# Altium PCB PCB1.PcbDoc
Units mm, origin at the board's own origin, x right, y up, seen from the top; angles counter-clockwise.
Board outline 152.4 x 101.6 mm, 2 copper layers (Top Layer, Bottom Layer), stack 1.071 mm thick; 47 components, 50 nets, 187 pads, 20 vias.
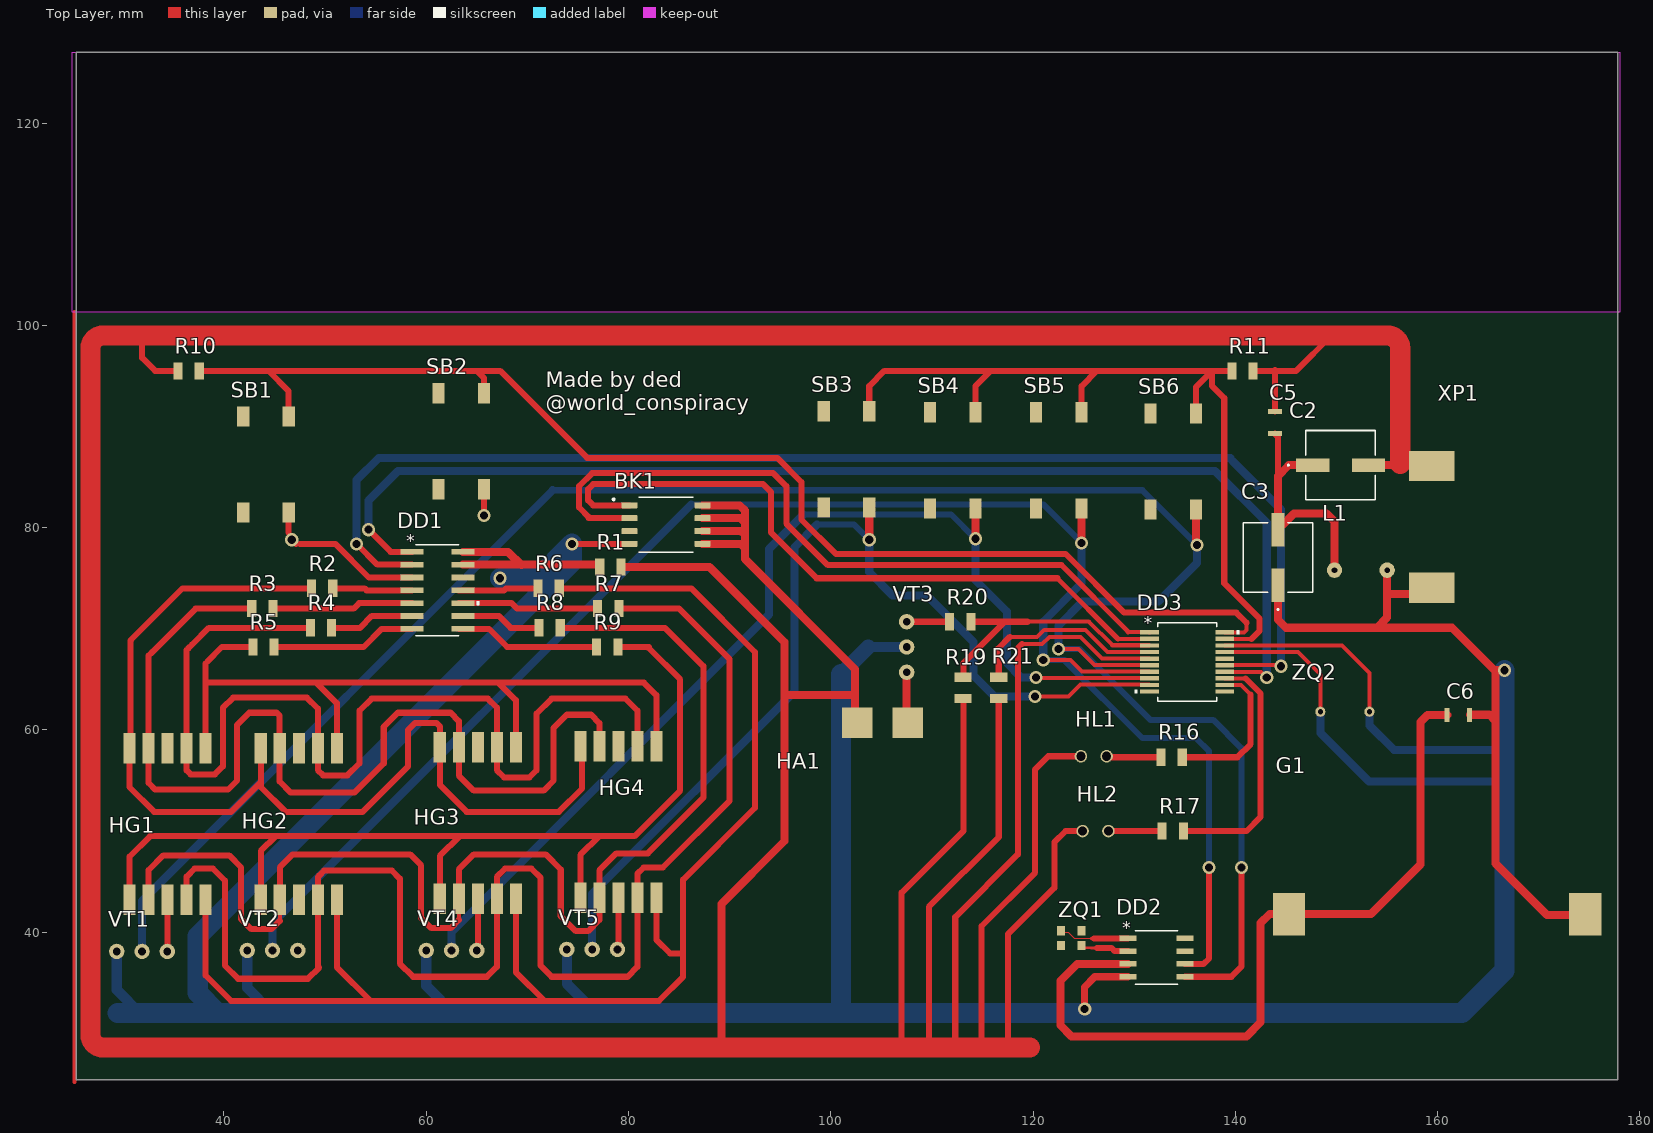
[diagram p0: Top Layer view]
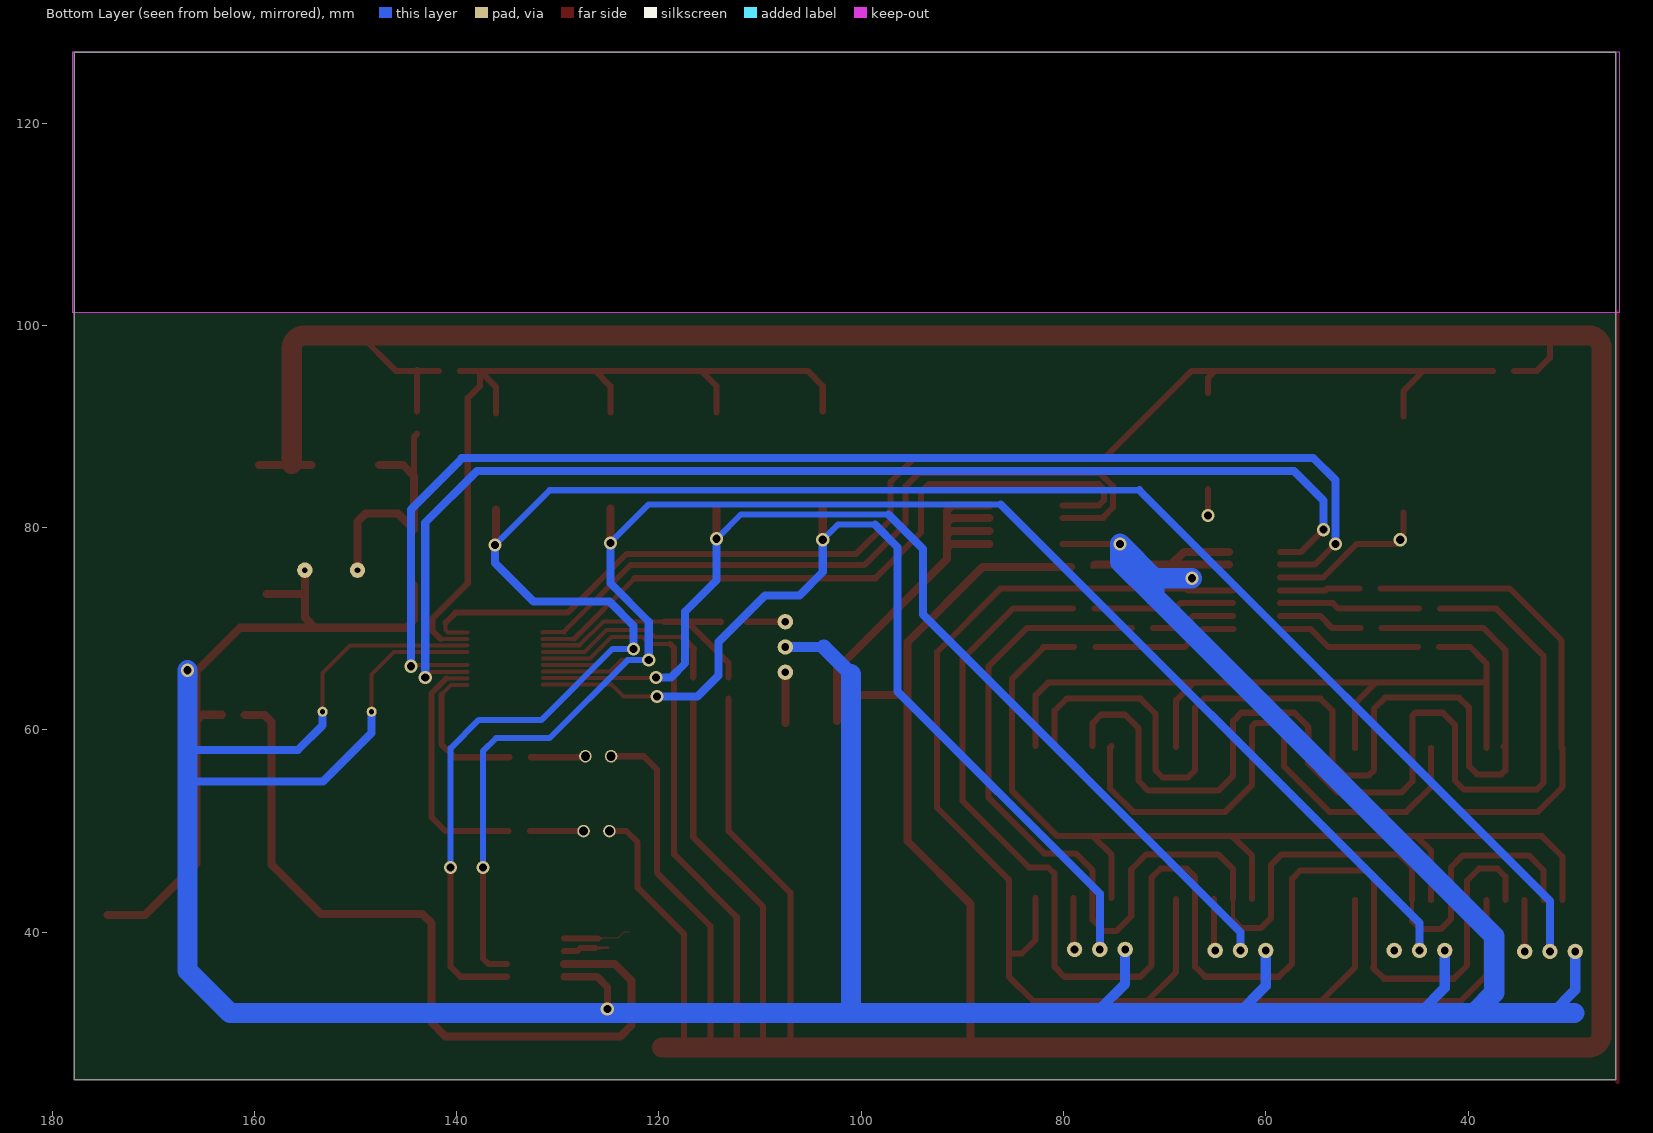
[diagram p1: Bottom Layer view, seen from below]

## Layer stack, top to bottom
Top Solder: solder mask 0.0102, Solder Resist, Dk 3.5
Top Layer: signal copper 0.0356
Dielectric 1: dielectric 1, FR-4, Dk 4.8
Bottom Layer: signal copper 0.0356
Bottom Solder: solder mask 0.0102, Solder Resist, Dk 3.5

## Board outline
25.4,25.4 177.8,25.4 177.8,127 25.4,127
cut-out: 178,127 178,101.3 25,101.3 25,127

## Design rules (kind name [scope] priority, off if disabled: settings)
Clearance [All] p1: gap=0.15 ignorepadtopadclearanceinfootprint=TRUE
ComponentClearance [All] p1: gap=0.254 collisioncheckmode=3 verticalgap=0 showdistances=FALSE
PolygonConnect [All] p1: connectstyle=Relief reliefconductorwidth=0.254 reliefentries=4 polygonreliefangle="90 Angle" airgapwidth=0.254
RoutingVias [All] p1: holewidth=0.711 width=1.27 viastyle="Through Hole" minholewidth=0.711 minwidth=1.27 maxholewidth=0.711 maxwidth=1.27
SolderMaskExpansion [All] p1: expansion=0.102 istentingtop=FALSE
Width [All] p1: maxlimit=2.5 minlimit=0.1 preferedwidth=0.4
29 further rules are at their usual default settings.

## Classes and differential pairs
component class Sheet1: HG1 HG2 HG3 HG4

## Components (designator, comment, footprint, x,y, rotation, side; value= is the part's Value field where it differs from the comment)
BK1 "Comment" DS1621 83.7,80.3 r0 top
C2 "Comment" ELECTROLYTHIC 150.4,86.175 r0 top
C3 "Comment" ELECTROLYTHIC 144.207,77.055 r90 top
C5 "Comment" 0805_C 143.9,89.3 r90 top
C6 "Comment" 0805_C 160.943,61.485 r0 top
DD1 "Comment" CD74HC164 61.1,73.8 r0 top
DD2 "Comment" DS1307 132.2,37.5 r0 top
DD3 "Comment" PIC16F84A 135.223,66.725 r0 top
G1 "Comment" CR2032 145.3,41.8 r0 top
HA1 "Comment" 1205FXP 107.6,60.7 r180 top
HG1 "FYS-10012BUG Foryard optoelectronics" "SMA802W G/W" 30.66,58.2 r0 top
HG2 "FYS-10012BUG Foryard optoelectronics" "SMA802W G/W" 43.64,58.2 r0 top
HG3 "FYS-10012BUG Foryard optoelectronics" "SMA802W G/W" 61.34,58.3 r0 top
HG4 "FYS-10012BUG Foryard optoelectronics" "SMA802W G/W" 75.24,58.4 r0 top
HL1 "Comment" L-34GD 124.724,57.4 r0 top
HL2 "Comment" L-34GD 124.9,50 r0 top
L1 "Comment" WVL9FJ560K 149.8,75.8 r0 top
R1 "Comment" 0805_R 78.2,76.1 r0 top
R2 "Comment" 0805_R 49.7,74 r0 top
R3 "Comment" 0805_R 43.8,72 r0 top
R4 "Comment" 0805_R 49.6,70.1 r0 top
R5 "Comment" 0805_R 43.9,68.2 r0 top
R6 "Comment" 0805_R 72.1,74 r180 top
R7 "Comment" 0805_R 78,72 r180 top
R8 "Comment" 0805_R 72.2,70.1 r180 top
R9 "Comment" 0805_R 77.9,68.2 r180 top
R10 "Comment" 0805_R 36.5,95.5 r0 top
R11 "Comment" 0805_R 140.7,95.5 r0 top
R16 "Comment" 0805_R 133.7,57.3 r0 top
R17 "Comment" 0805_R 133.8,50 r0 top
R19 "Comment" 0805_R 113.062,64.157 r90 top
R20 "Comment" 0805_R 112.8,70.7 r0 top
R21 "Comment" 0805_R 116.6,64.157 r90 top
SB1 "Comment" TS-A3PG-130 41.9,81.5 r90 top
SB2 "Comment" TS-A3PG-130 61.2,83.8 r90 top
SB3 "Comment" TS-A3PG-130 99.3,82 r90 top
SB4 "Comment" TS-A3PG-130 109.8,81.9 r90 top
SB5 "Comment" TS-A3PG-130 120.3,81.9 r90 top
SB6 "Comment" TS-A3PG-130 131.6,81.8 r90 top
VT1 "Comment" KT361B 29.4,38.1 r0 top
VT2 "Comment" KT361B 42.3,38.2 r0 top
VT3 "Comment" KT315B 107.5,65.7 r90 top
VT4 "Comment" KT361B 60,38.2 r0 top
VT5 "Comment" KT361B 73.9,38.3 r0 top
XP1 "Comment" KLS1-AS-222-11 159.4,86.1 r270 top
ZQ1 "Comment" DT-38 124.8,38.7 r180 top
ZQ2 "Comment" HC-49S 148.4,61.8 r0 top

## Footprints (in the part's own frame and the unit in brackets; to place one, negate y for a bottom-side part, rotate by r counter-clockwise, add the part's x,y. Pads: shape width x height; smd on the part's side, far side on the other; paste and mask are expansions set on the pad)
0805_C [mm]
  rect 0.5x1.4 smd: 1(0,0) 2(2.2,0)
  body extent 0,-0.6 2.2,0.6, height 0.4
0805_R [mm]
  rect 0.9x1.7 smd: 1(-1.05,0) 2(1.05,0)
  body extent -1.05,-0.7 1.05,0.7, height 0.4
1205FXP [mm]
  rect 3x3 smd: 1(0,0) 2(5,0)
  body extent -12.45,4.87 17.98,35.2, height 20
CD74HC164 [mm]
  rect 2.27x0.558 smd paste+0 mask+0: 1(-2.514,3.81) 2(-2.514,2.54) 3(-2.514,1.27) 4(-2.514,0) 5(-2.514,-1.27) 6(-2.514,-2.54) 7(-2.514,-3.81) 8(2.514,-3.81) 9(2.514,-2.54) 10(2.514,-1.27) 11(2.514,0) 12(2.514,1.27) 13(2.514,2.54) 14(2.514,3.81)
  silkscreen extent -2.12,-4.5 4.16,4.5, body extent -3.01,-4.32 3.01,4.33, height 1.75
CR2032 [mm]
  rect 3.2x4.2 smd: 1(0,0) 2(29.3,0)
  body extent -1,-15.6 30.2,15.6, height 5
DS1307 [mm]
  rect 1.655x0.533 smd paste+0 mask+0: 1(-2.821,1.905) 2(-2.821,0.635) 3(-2.821,-0.635) 4(-2.821,-1.905) 5(2.821,-1.905) 6(2.821,-0.635) 7(2.821,0.635) 8(2.821,1.905)
  silkscreen extent -2.12,-2.63 2.12,2.63, body extent -3.1,-2.5 3.1,2.5, height 1.76
DS1621 [mm]
  rrect25% 1.57x0.6 smd: 1(-3.605,1.905) 2(-3.605,0.635) 3(-3.605,-0.635) 4(-3.605,-1.905) 5(3.605,-1.905) 6(3.605,-0.635) 7(3.605,0.635) 8(3.605,1.905)
  silkscreen extent -5.27,-2.73 2.71,2.73, body extent -3.1,-2.5 3.1,2.5, height 1.76
DT-38 [mm]
  rect 0.8x0.9 smd: 1(0,-1.45) 2(2.05,-1.45) 3(2.05,0) 4(0,0)
  Top Layer lines w0.1: 1.9,-1.3 1.35,-1.3 0.75,-0.7 -0.925,-0.7
  Top Layer lines w0.254: -0.225,0.25 -0.925,0.25
  Top Layer lines w0.3: -0.925,0.25 -1.525,0.25 ; -0.925,-0.7 -1.525,-0.7
  body extent -0.2,-1.7 2.3,0.3, height 0.8
ELECTROLYTHIC [mm]
  rect 3.291x1.313 smd paste+0 mask+0: 1(-2.75,0) 2(2.75,0)
  silkscreen extent -5.23,-3.43 3.43,3.43, body extent -3.7,-3.3 3.7,3.3, height 8.05
HC-49S [mm]
  round 1 hole 0.5: 1(0,0) 2(4.85,0)
  body extent -3.05,-2.3 7.95,2.35, height 13.46
KLS1-AS-222-11 [mm]
  rect 3x4.5 smd: 1(0,0) 2(12.05,0)
  body extent -9.97,2.32 22.1,21.78, height 7
KT315B [mil]
  round 60 hole 30: 1(0,0) 2(98.43,0) 3(196.85,0)
  body extent -42,-56 242,63, height 197
KT361B [mil]
  round 60 hole 30: 1(0,0) 2(98.43,0) 3(196.85,0)
  body extent -42,-56 242,63, height 197
L-34GD [mm]
  round 1.24 hole 0.9: 1(0,0) 2(2.55,0)
  body extent -0.7,-1.95 3.35,2.05, height 5.3
PIC16F84A [mm]
  rect 1.858x0.431 smd paste+0 mask+0: 1(-3.723,2.925) 2(-3.723,2.275) 3(-3.723,1.625) 4(-3.723,0.975) 5(-3.723,0.325) 6(-3.723,-0.325) 7(-3.723,-0.975) 8(-3.723,-1.625) 9(-3.723,-2.275) 10(-3.723,-2.925) 11(3.723,-2.925) 12(3.723,-2.275) 13(3.723,-1.625) 14(3.723,-0.975) 15(3.723,-0.325) 16(3.723,0.325) 17(3.723,0.975) 18(3.723,1.625) 19(3.723,2.275) 20(3.723,2.925)
  silkscreen extent -5.16,-3.87 5.16,3.87, body extent -4.18,-3.75 4.03,3.75, height 2.01
"SMA802W G/W" [mm]
  rect 1.2x3 smd: 1(0,0) 2(1.88,0) 3(3.76,0) 4(5.64,0) 5(7.52,0) 6(0,-15) 7(1.88,-15) 8(3.76,-15) 9(5.64,-15) 10(7.52,-15)
  body extent -0.75,-14.8 8.35,0.2, height 3.75
TS-A3PG-130 [mm]
  rect 2x1.2 smd: 1(0,0) 2(9.5,0) 3(0,-4.5) 4(9.5,-4.5)
  body extent -0.3,-5.4 9.7,0.9, height 7.65
WVL9FJ560K [mil]
  round 60 hole 21.65: 1(0,0) 2(204.72,0)
  body extent -52,-157 263,157, height 394

## Part data
HG1 HG2 HG3 HG4: library part "SMA802W G/W", "https://www.digikey.com/en/products/detail/american-opto-plus/SMA802W-G-W/13686837", Manufacturer="Foryard optoelectronics", Name=FYS-10012BUG

## Via types
v1: diameter 1.3, hole 0.8, Top Layer to Bottom Layer, 20 vias

## Nets (pads, with @x,y where several pads share a name; then routed paths per layer and width w, separated by ;. In a path a pad name is that pad's centre, name@x,y a point inside that pad or via, vN(x,y) a via of type N, cw(c..) or ccw(c..) an arc to the next point about the centre after c; other vN are vias at no path point)
1: 
2: 
3: 
4: 
5: 
6: 
7: 
8: 
11: 
12: 
13: 
14: 
15: 
16: 
17: 
18: 
NetBK1_1: 
NetBK1_2: 
NetBK1_4: 
NetBK1_5: 
NetC1_2: 
NetC6_2: 
NetC7_2: 
NetC8_2: 
NetDD1_3: 
NetDD1_4: 
NetDD1_5: 
NetDD1_6: 
NetDD1_10: 
NetDD1_11: 
NetDD1_12: 
NetDD1_13: 
NetDD2_1: 
NetDD2_2: 
NetDD3_3: 
NetDD3_4: 
NetDD3_17: 
NetDD3_18: 
NetHA1_2: 
NetHG1_8: 
NetHG2_8: HG2.8
NetHG3_8: 
NetHG4_8: 
NetHL1_2: 
NetHL2_2: 
NetR14_2: 
NetR15_2: 
NetR18_2: 
NetR20_1: 
NetR22_2: 
pads on no net: BK1.1 BK1.2 BK1.3 BK1.4 BK1.5 BK1.6 BK1.7 BK1.8 C2.1 C2.2 C3.1 C3.2 C5.1 C5.2 C6.1 C6.2 DD1.1 DD1.2 DD1.3 DD1.4 DD1.5 DD1.6 DD1.7 DD1.8 DD1.9 DD1.10 DD1.11 DD1.12 DD1.13 DD1.14 DD2.1 DD2.2 DD2.3 DD2.4 DD2.5 DD2.6 DD2.7 DD2.8 DD3.1 DD3.2 DD3.3 DD3.4 DD3.5 DD3.6 DD3.7 DD3.8 DD3.9 DD3.10 DD3.11 DD3.12 DD3.13 DD3.14 DD3.15 DD3.16 DD3.17 DD3.18 DD3.19 DD3.20 G1.1 G1.2 HA1.1 HA1.2 HG1.1 HG1.2 HG1.3 HG1.4 HG1.5 HG1.6 HG1.7 HG1.8 HG1.9 HG1.10 HG2.1 HG2.2 HG2.3 HG2.4 HG2.5 HG2.6 HG2.7 HG2.9 HG2.10 HG3.1 HG3.2 HG3.3 HG3.4 HG3.5 HG3.6 HG3.7 HG3.8 HG3.9 HG3.10 HG4.1 HG4.2 HG4.3 HG4.4 HG4.5 HG4.6 HG4.7 HG4.8 HG4.9 HG4.10 HL1.1 HL1.2 HL2.1 HL2.2 L1.1 L1.2 R1.1 R1.2 R2.1 R2.2 R3.1 R3.2 R4.1 R4.2 R5.1 R5.2 R6.1 R6.2 R7.1 R7.2 R8.1 R8.2 R9.1 R9.2 R10.1 R10.2 R11.1 R11.2 R16.1 R16.2 R17.1 R17.2 R19.1 R19.2 R20.1 R20.2 R21.1 R21.2 SB1.1 SB1.2 SB1.3 SB1.4 SB2.1 SB2.2 SB2.3 SB2.4 SB3.1 SB3.2 SB3.3 SB3.4 SB4.1 SB4.2 SB4.3 SB4.4 SB5.1 SB5.2 SB5.3 SB5.4 SB6.1 SB6.2 SB6.3 SB6.4 VT1.1 VT1.2 VT1.3 VT2.1 VT2.2 VT2.3 VT3.1 VT3.2 VT3.3 VT4.1 VT4.2 VT4.3 VT5.1 VT5.2 VT5.3 XP1.1 XP1.2 ZQ1.1 ZQ1.2 ZQ1.3 ZQ1.4 ZQ2.1 ZQ2.2
copper on no net: | length 3623.5
  Top Layer w0.4: 25.2,25.2 25.2,101.3 ; 45.52,41.12 45.52,43.2 ; 46.4,79.5 46.7,79.2 v1(46.7,78.8) ; v1@47.1,78.4 47.5,78.4 ; 63.22,41.22 63.22,43.3 ; 76.91,76.34 77.15,76.1 ; 102.4,60.9 102.5,60.8 ; 117.9,69.2 120.4,69.2 121.1,69.9 123.789,69.9 125.2,69.9 127.375,67.725 129.277,67.725 131.475,67.725 ; 119.1,68.5 120.9,68.5 121.6,69.2 124.7,69.2 126.825,67.075 129.277,67.075 131.475,67.075 ; 119.45,70.7 123.8,70.7 125.5,70.7 127.825,68.375 129.277,68.375 131.475,68.375 ; v1(120.2,63.3) 123.5,63.3 124.675,64.475 129.277,64.475 131.475,64.475 ; v1(120.3,65.2) 120.375,65.125 129.277,65.125 131.475,65.125 ; v1(121,66.9) 123.7,66.9 124.825,65.775 129.277,65.775 131.475,65.775 ; v1(122.5,68) 124.5,68 126.075,66.425 129.277,66.425 131.475,66.425 ; 128.4,69 131.5,69 ; 129.4,69.7 130.588,69.7 130.623,69.666 131.484,69.666 131.5,69.65 ; 138.946,64.45 140.55,64.45 141.5,63.5 ; 138.946,65.1 141,65.1 ; 138.946,65.75 142.55,65.75 v1(143.1,65.2) ; 138.946,66.4 v1@144.4,66.4 ; 138.946,67.7 145.3,67.7 146.2,67.7 148.4,65.5 148.4,61.8 ; 138.946,68.35 146.75,68.35 150.55,68.35 153.25,65.65 153.25,61.8 ; 138.946,69 141.6,69 ; 138.946,69.65 140.85,69.65 141.1,69.9 141.1,70.6 ; 143.8,95.5 143.9,95.6 ; 156.4,86.9 156.928,86.372 156.928,86.175 ; 163.143,61.485 163.178,61.485 163.193,61.5 ; 165.7,65.8 165.8,65.9 ; 174.5,41.7 174.6,41.8
  Top Layer w0.5: 122.4,75 128.4,69 ; 122.8,76.3 129.4,69.7
  Top Layer w0.6: 30.66,43.2 30.66,47.46 32.7,49.5 45.1,49.5 ; 30.66,58.2 30.66,54.34 33.1,51.9 40.7,51.9 43.64,54.84 ; 30.74,58.2 30.74,59.94 30.74,68.84 30.84,68.94 35.9,74 48.65,74 ; 31.9,98.9 31.9,96.8 33.2,95.5 35.45,95.5 ; 32.54,43.2 32.54,46.14 34,47.6 40.5,47.6 41.7,46.4 41.7,41.3 42.7,40.3 44.7,40.3 45.52,41.12 ; 34.4,38.1 34.4,43.18 ; 36.3,43.2 36.3,45.5 37.1,46.3 38.9,46.3 40.1,45.1 40.1,36.7 41.4,35.4 48.3,35.4 49.4,36.5 ; 36.48,58.38 36.3,58.2 ; 37.55,95.5 44.4,95.5 ; 38.18,43.2 38.18,35.72 40.7,33.2 54.5,33.2 ; 38.18,58.2 38.18,66.58 ; 38.26,64.68 49.12,64.68 ; 38.36,66.76 39.8,68.2 42.85,68.2 ; 42.75,72 37.2,72 32.9,67.7 32.54,67.34 32.54,58.2 32.54,54.76 33.2,54.1 40.4,54.1 41.3,55 41.3,60.5 42.5,61.7 45.2,61.7 45.5,61.4 45.5,58.22 45.5,54.9 46.6,53.8 52.9,53.8 55.8,56.7 55.8,60.3 57.2,61.7 62.4,61.7 63.22,60.88 63.22,58.3 63.22,55.48 64.7,54 71.6,54 72.6,55 72.6,60.2 73.9,61.5 76.3,61.5 77.12,60.68 77.12,58.4 ; 43.64,43.2 43.64,48.04 45.1,49.5 ; 43.64,58.2 43.64,54.84 ; 44.85,72 52.82,72 53.36,72.54 58.576,72.54 ; 44.95,68.2 53.8,68.2 55.6,70 ; 45.52,43.2 45.52,46.42 46.8,47.7 53.9,47.7 58.4,47.7 59.5,46.6 59.5,41.4 60.5,40.4 62.4,40.4 63.22,41.22 ; 46.4,79.5 46.4,81.5 ; 46.4,91 46.4,93.5 44.4,95.5 ; v1(46.7,78.8) v1@47.1,78.4 ; 47.5,78.4 51,78.4 54.33,75.07 58.586,75.07 ; 48.55,70.1 38.5,70.1 36.85,68.45 36.48,68.08 36.3,67.9 36.3,58.2 ; 49.28,36.62 49.28,43.2 49.28,45.48 ; 49.4,45.6 49.9,46.1 56.6,46.1 57.4,45.3 57.4,36.9 58.7,35.6 66,35.6 66.98,36.58 66.98,43.3 66.98,45.48 67.8,46.3 70.4,46.3 71.3,45.4 71.3,36.7 72.4,35.6 79.9,35.6 80.88,36.58 80.88,43.4 80.88,45.78 81.5,46.4 83.4,46.4 90,53 90,67 85,72 84.6,72 79.05,72 ; 50.65,70.1 53.46,70.1 54.63,71.27 58.576,71.27 58.586,71.26 ; 50.75,74 53.9,74 54.1,73.8 58.586,73.8 ; 51.16,43.2 51.16,36.54 54.5,33.2 ; 51.16,58.2 51.16,62.64 49.12,64.68 ; v1(53.1,78.4) 55.16,76.34 58.586,76.34 ; v1(54.3,79.8) 56.49,77.61 58.586,77.61 ; 55.61,69.99 58.586,69.99 ; 61.34,43.3 61.34,47.54 63.3,49.5 ; 63.214,69.99 66.19,69.99 ; 63.214,73.8 67.7,73.8 67.9,74 71.05,74 ; 63.22,43.3 63.22,46.22 64.7,47.7 71.8,47.7 73.3,46.2 73.3,41.6 74.8,40.1 76,40.1 77.12,41.22 77.12,43.4 77.12,46.12 78.8,47.8 81.9,47.8 87.4,53.3 87.4,66.3 83.6,70.1 83.3,70.1 73.25,70.1 ; 63.224,71.27 67.17,71.27 68.34,70.1 71.15,70.1 ; 63.224,72.54 68.44,72.54 68.98,72 76.95,72 ; 65.1,38.3 65.1,43.3 ; v1(65.7,81.2) 65.7,83.8 ; 65.7,93.3 65.7,94.8 65,95.5 ; 66.2,70 68,68.2 76.85,68.2 ; 68.86,43.3 68.86,36.04 71.7,33.2 ; 68.86,58.3 68.86,62.94 67.12,64.68 ; 73.15,74 85.9,74 86.2,74 92.5,67.7 92.5,52.3 85.4,45.2 85.4,35.6 83,33.2 71.7,33.2 ; v1(74.4,78.4) 80.09,78.4 ; 75.24,43.4 75.24,47.64 77.1,49.5 ; 75.24,58.4 75.4,58.24 75.4,54.2 73.1,51.9 64,51.9 61.34,54.56 61.34,58.3 61.34,60.36 61,60.7 58.9,60.7 58.2,60 58.2,56.4 53.7,51.9 46.1,51.9 43.64,54.36 43.64,54.84 ; 78.95,68.2 82,68.2 82,68.1 85.1,65 85.1,54 80.6,49.5 77.1,49.5 ; 79,38.4 79,43.4 ; 80.095,80.935 76.065,80.935 76.065,81.035 75.1,82 75.1,84.1 76.4,85.4 94.3,85.4 95.6,84.1 95.6,80.4 99.7,76.3 105.7,76.3 122.8,76.3 ; 80.095,82.205 76.605,82.205 76.495,82.205 76,82.7 76,83.8 76.5,84.3 93.3,84.3 94.1,83.5 94.1,79.5 98.6,75 104.6,75 122.4,75 ; 80.88,58.4 80.88,61.92 79.7,63.1 72.4,63.1 70.9,61.6 70.9,56 70.2,55.3 67.7,55.3 66.98,56.02 66.98,58.3 66.98,62.22 66.1,63.1 54.6,63.1 53.4,61.9 53.4,56.7 52.2,55.5 49.8,55.5 49.28,56.02 49.28,58.2 49.28,62.12 48.2,63.2 40.9,63.2 39.9,62.2 39.9,56.4 39.1,55.6 36.7,55.6 36.3,56 36.3,58.2 ; 82.76,43.4 82.76,39.24 84.1,37.9 85.35,37.9 ; 82.76,58.4 82.76,63.44 81.52,64.68 67.12,64.68 ; 103.8,91.5 103.8,94 105.3,95.5 115.8,95.5 ; 107,29.6 107,43.9 113.1,50 113.1,63.107 ; 107.5,70.7 111.35,70.7 ; 109.7,29.6 109.7,42.5 116.6,49.4 ; 112.3,29.6 112.3,41.5 118.5,47.7 ; 113.1,65.207 113.1,66.6 117.2,70.7 ; 113.85,70.7 119.45,70.7 ; 114.3,91.4 114.3,94 115.8,95.5 ; 114.9,29.4 114.9,40.6 120.2,45.9 120.2,56.1 121.5,57.4 124.724,57.4 ; 116.55,68.05 117.7,69.2 ; 116.6,49.5 116.6,63.107 ; 116.6,65.207 116.6,68 ; 117.5,29.5 117.5,39.8 122.1,44.4 122.1,48.9 123.2,50 124.9,50 ; 118.5,47.8 118.5,68.1 118.9,68.5 ; 124.8,91.4 124.8,94 126.3,95.5 ; 126.025,39.4 129.374,39.4 ; 126.325,38.45 127.75,38.45 128.065,38.135 129.379,38.135 ; 127.374,57.3 132.65,57.3 ; 127.45,50 132.75,50 ; 134.75,57.3 140.2,57.3 141.5,58.6 141.5,63.5 ; 134.85,50 141.1,50 142.5,51.4 142.5,63.6 141,65.1 ; 135.021,35.595 139.595,35.595 140.6,36.6 140.6,42.9 v1(140.6,46.4) ; 135.021,36.865 136.865,36.865 137.4,37.4 v1(137.4,46.4) ; 136.1,91.3 136.1,93.9 137.7,95.5 ; 139.65,95.5 137.7,95.5 ; 141.1,70.6 140.1,71.6 129,71.6 123.2,77.4 100.5,77.4 97.1,80.8 97.1,84.5 94.7,86.9 75.9,86.9 67.3,95.5 65,95.5 ; 141.6,69 142.4,69.8 142.4,71 138.9,74.5 138.9,92.8 137.7,94 137.7,95.5 ; 141.75,95.5 143.8,95.5 146,95.5 149.5,99 ; 143.9,89.3 144.207,88.993 144.207,85.107 ; 143.9,91.5 143.9,95.6 ; 44.4,95.5 65,95.5 ; 45.1,49.5 63.3,49.5 ; 49.12,64.68 67.12,64.68 ; 54.5,33.2 71.7,33.2 ; 63.3,49.5 77.1,49.5 ; 115.8,95.5 126.3,95.5 ; 126.3,95.5 137.7,95.5
  Top Layer w0.7: v1(125.1,32.4) 125.1,34.6 126.095,35.595 129.379,35.595
  Top Layer w0.8: 63.614,76.34 76.91,76.34 ; 63.614,77.61 68.09,77.61 69.4,76.3 ; 79.25,76.1 88,76.1 95.4,68.7 95.4,49 89.2,42.8 89.2,28.7 ; 87.305,78.395 91.105,78.395 91.5,78 ; 87.305,79.665 91.135,79.665 91.5,79.3 ; 87.305,80.935 91.065,80.935 91.5,80.5 ; 87.305,82.205 90.995,82.205 91.5,81.7 91.5,76.9 102.4,66 102.4,60.9 ; 95.45,63.45 102.4,63.45 ; v1(103.8,78.8) 103.8,82 ; 107.5,60.7 107.5,65.7 ; v1(114.3,78.9) 114.3,81.9 ; v1(124.8,78.5) 124.8,81.9 ; 129.379,36.865 124.365,36.865 122.7,35.2 122.7,30.8 123.8,29.7 141.1,29.7 142.5,31.1 142.5,40.9 143.4,41.8 145.3,41.8 153.4,41.8 158.3,46.7 158.3,60.8 158.985,61.485 160.943,61.485 ; v1@136.1,78.4 136.1,81.8 ; 144.207,74.305 144.207,70.893 145,70.1 154,70.1 ; 147.65,86.175 145.275,86.175 144.207,85.107 144.207,79.805 145.802,81.4 149,81.4 149.8,80.6 149.8,75.8 ; 154.331,86.175 159.525,86.175 ; 155,73.45 158.8,73.45 ; 155,75.8 155,71.1 154,70.1 ; 163.193,61.5 165.1,61.5 165.7,60.9 ; 165.8,65.9 v1(166.6,65.9) ; 174.5,41.7 170.8,41.7 165.7,46.8 165.7,60.9 ; 154,70.1 161.4,70.1 165.7,65.8 165.7,60.9
  Top Layer w2: 119.7,28.6 28.07,28.6 cw(c28.07,29.87) 26.8,29.87 26.8,97.73 cw(c28.07,97.73) 28.07,99 155.03,99 cw(c155.03,97.73) 156.3,97.73 156.3,86.3
  Bottom Layer w0.4: 71,73.2 71,75
  Bottom Layer w0.6: 72.5,83.7 130.8,83.7 v1(136.2,78.3) ; 86.2,82.3 121,82.3 v1(124.8,78.5) ; 97.3,81.3 111.9,81.3 v1(114.3,78.9) ; 98.634,80.3 102.3,80.3 v1(103.8,78.8) ; v1(121,66.9) 123.1,66.9 130.8,59.2 136.1,59.2 137.4,57.9 v1(137.4,46.4) ; v1(122.5,68) 124.6,68 131.6,61 137.8,61 140.6,58.2 v1@140.6,46.7
  Bottom Layer w0.8: 31.9,38.1 31.9,43.1 72.5,83.7 ; 44.8,38.2 44.8,40.9 86.2,82.3 ; v1(53.1,78.4) 53.1,84.7 55.3,86.9 139.5,86.9 ; v1(54.3,79.8) 54.3,82.7 57.2,85.6 138,85.6 143.1,80.5 v1(143.1,65.2) ; 62.5,38.2 62.5,40 93.9,71.4 93.9,77.9 97.3,81.3 ; 76.4,38.3 76.4,43.8 96.4,63.8 96.4,78.066 98.634,80.3 ; v1(103.8,78.8) 103.8,75.6 106.1,73.3 109.5,73.3 114.1,68.7 114.1,65.4 116.2,63.3 v1(120.2,63.3) ; v1(114.3,78.9) 114.3,74.8 117.4,71.7 117.4,66.6 118.8,65.2 v1(120.3,65.2) ; v1(121,66.9) 121,70.7 124.8,74.5 v1(124.8,78.5) ; v1(122.5,68) 122.5,70.3 124.9,72.7 132.4,72.7 136.2,76.5 v1(136.2,78.3) ; 139.7,86.6 144.5,81.8 v1(144.5,66.3) ; 148.4,61.8 148.4,59.7 153.2,54.9 166.2,54.9 ; 153.25,61.8 153.25,60.45 155.7,58 166.2,58
  Bottom Layer w1: 29.4,38.1 29.4,34.3 31.8,31.9 ; 42.3,38.2 42.3,34.5 44.6,32.2 ; 60,38.2 60,34.7 62.9,31.8 ; 73.9,38.3 73.9,34.9 76.5,32.3 ; 103.7,68.2 107.5,68.2
  Bottom Layer w1.5: 101,65.5 103.7,68.2
  Bottom Layer w2: 29.5,32 31.8,32 44.6,32 62.9,32 76.5,32 101,32 ; 39.3,32.1 37.4,34 37.4,39.6 71,73.2 ; v1(67.3,75) 71,75 ; 101,65.5 101,32 ; v1(166.6,65.9) 166.6,58 166.6,54.9 166.6,36.2 162.4,32 125.1,32 101,32 ; 71,73.2 74.4,76.6 v1(74.4,78.4) 71,75 ; 71,73.2 71,75

## Silkscreen, mask and mechanical layers (free items; w line width, h text height)
Top Overlay:
  text "Made by ded  / @world_conspiracy" at 71.8,91.6 h1.52
Drill Drawing:
  lines w0.254: 204.668,36.191 205.598,36.191 205.598,35.261 207.458,35.261 207.458,36.191 208.388,36.191 208.388,38.051 207.458,38.051 207.458,38.981 205.598,38.981 205.598,38.051 204.668,38.051 204.668,36.191 ; 204.668,43.63 208.388,43.63 208.388,47.35 204.668,47.35 204.668,43.63 ; 204.668,55.72 208.388,55.72 206.528,52 204.668,55.72 ; 204.668,60.369 206.528,61.299 208.388,60.369 207.458,62.229 208.388,64.089 206.528,63.159 204.668,64.089 205.598,62.229 204.668,60.369 ; 204.668,69.669 205.598,69.669 206.528,68.739 207.458,69.669 208.388,69.669 207.458,70.599 208.388,71.529 207.458,71.529 206.528,72.459 205.598,71.529 204.668,71.529 205.598,70.599 204.668,69.669
  lines w0.5: 192.95,74.598 285.858,74.598 ; 219.296,32.75 219.296,82.967 ; 241.235,32.75 241.235,82.967 ; 257.615,32.75 257.615,82.967 ; 192.95,32.75 285.858,32.75 285.858,82.967 192.95,82.967 192.95,32.75
  text "??????????" at 197.972,77.108 h4.8
  text "?????????" at 221.807,77.108 h4.8
  text "??????" at 243.746,77.108 h4.8
  text "???????????" at 260.126,77.108 h4.8
  text "2" at 229.273,68.739 h4
  text "0,500mm" at 243.84,68.739 h4
  text "PTH" at 267.735,68.739 h4
  text "2" at 229.273,60.369 h4
  text "0,550mm" at 243.935,60.369 h4
  text "PTH" at 267.735,60.369 h4
  text "4" at 229.608,52 h4
  text "0,900mm" at 243.746,52 h4
  text "PTH" at 267.735,52 h4
  text "15" at 229.014,43.63 h4
  text "0,762mm" at 243.746,43.63 h4
  text "PTH" at 267.735,43.63 h4
  text "20" at 228.427,35.261 h4
  text "0,800mm" at 243.746,35.261 h4
  text "PTH" at 267.735,35.261 h4

## Text inside footprints (layer, text, board x,y; h text height)
DD1: Top Overlay "*" at 58.015,78.041 h1.27; Top Assembly "*" at 59.17,76.823 h1.27
DD2: Top Overlay "*" at 128.807,39.811 h1.27; Top Assembly "*" at 130.27,38.656 h1.27
DD3: Top Overlay "*" at 130.929,69.954 h1.27; Top Assembly "*" at 132.493,69.125 h1.27